# Altium PCB PCB.PcbDoc
Units mm, origin at the board's own origin, x right, y up, seen from the top; angles counter-clockwise.
Board outline 35.7 x 16.8 mm, 2 copper layers (Top Layer, Bottom Layer), stack 1.671 mm thick; 11 components, 9 nets, 30 pads, 7 vias.
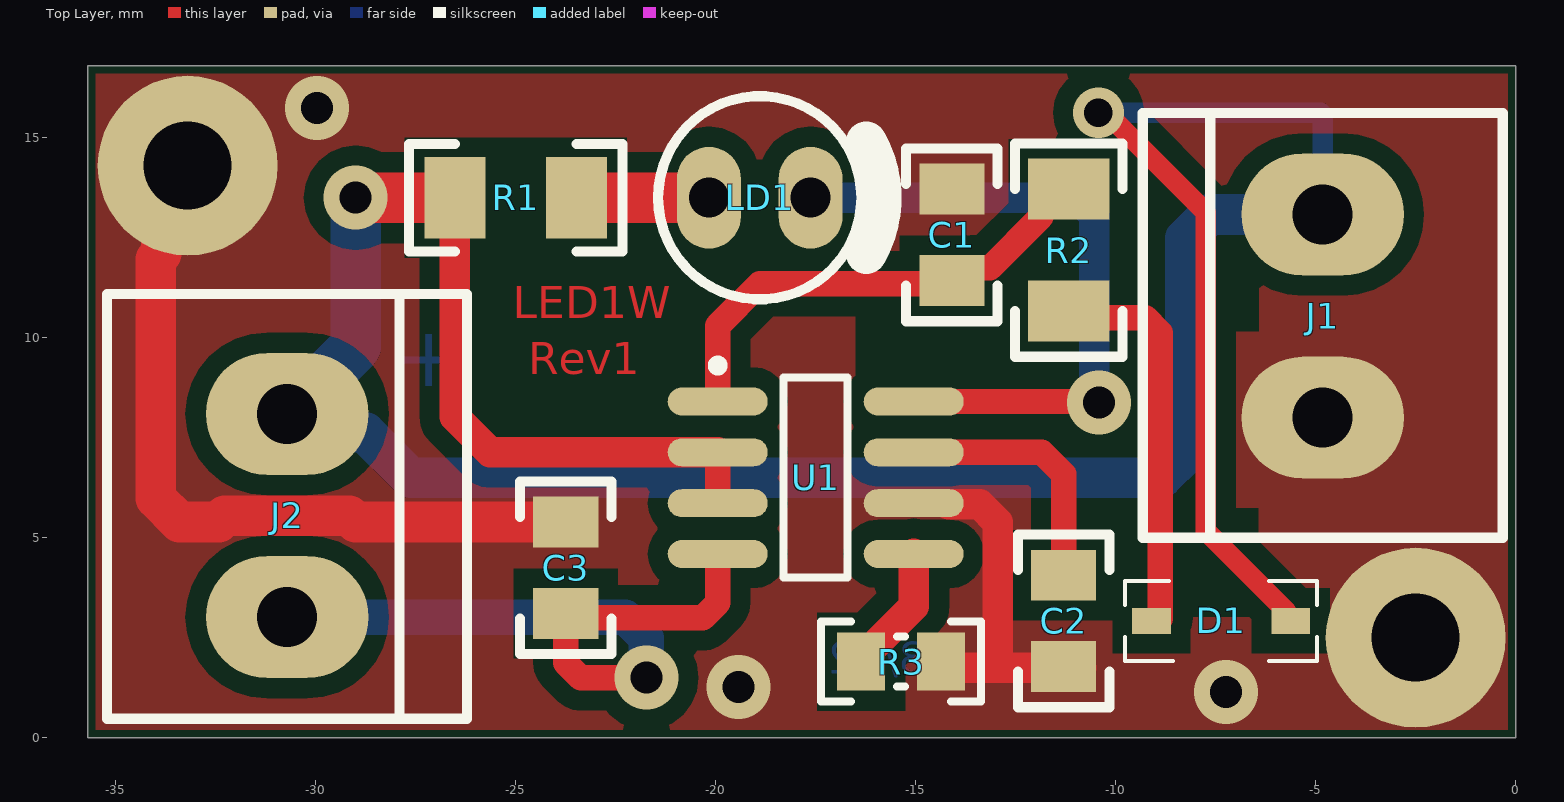
[diagram p0: Top Layer view]
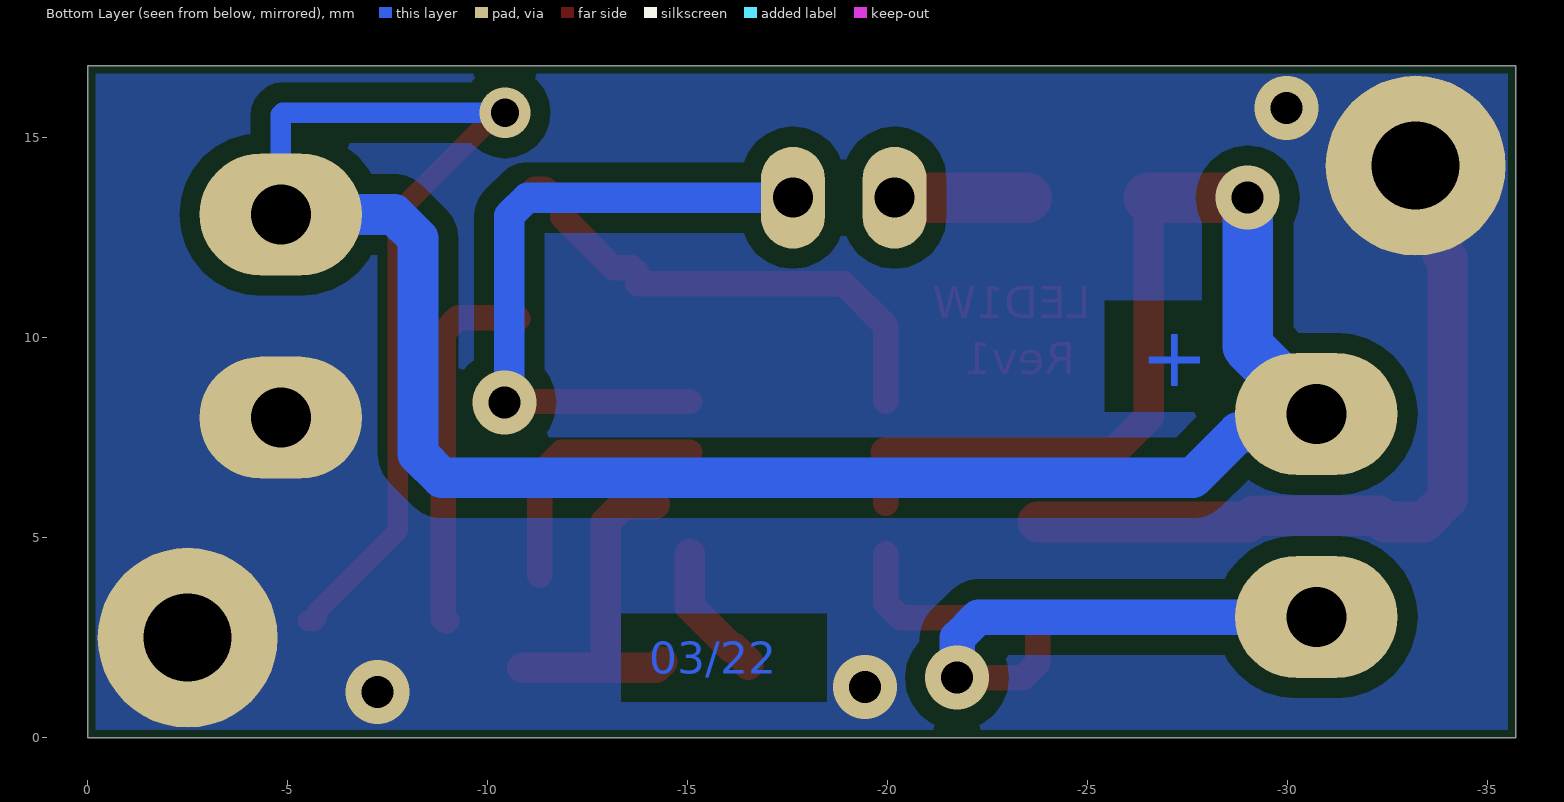
[diagram p1: Bottom Layer view, seen from below]
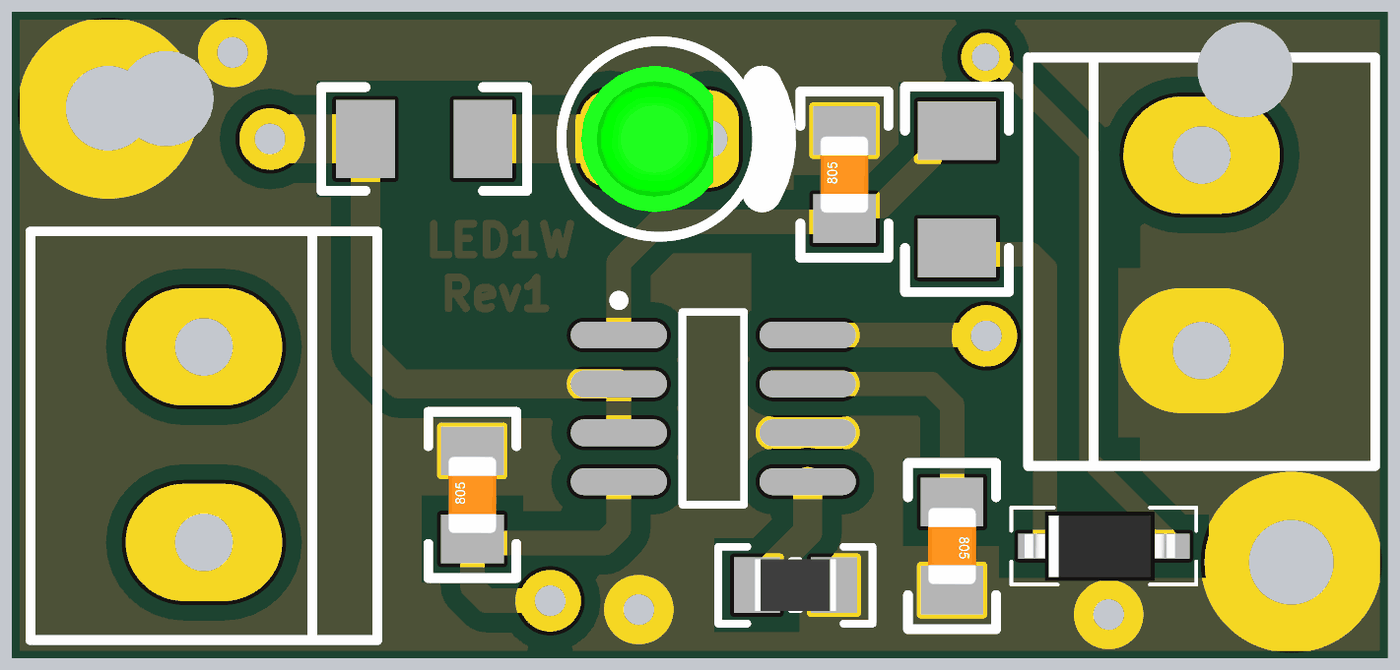
[diagram p2: 3D render of the assembled board from above, using the file's embedded part models]

## Layer stack, top to bottom
Top Solder: solder mask 0.0102, Solder Resist, Dk 3.5
Top Layer: signal copper 0.0356
Dielectric 1: dielectric 1.6, FR-4, Dk 4.8
Bottom Layer: signal copper 0.0356
Bottom Solder: solder mask 0.0102, Solder Resist, Dk 3.5

## Board outline
-35.7,16.8 0,16.8 0,0 -35.7,0

## Design rules (kind name [scope] priority, off if disabled: settings)
Clearance [All] p1: gap=0.5 ignorepadtopadclearanceinfootprint=FALSE
PolygonConnect [All] p1: connectstyle=Direct reliefconductorwidth=0.254 reliefentries=4 polygonreliefangle="90 Angle" airgapwidth=0.254
RoutingVias [All] p1: holewidth=0.711 width=1.27 viastyle="Through Hole" minholewidth=0.711 minwidth=1.27 maxholewidth=0.711 maxwidth=1.27
SolderMaskExpansion [All] p1: expansion=0.102 istentingtop=FALSE
Width [All] p1: maxlimit=1.5 minlimit=0.381 preferedwidth=0.635
30 further rules are at their usual default settings.

## Components (designator, comment, footprint, x,y, rotation, side; value= is the part's Value field where it differs from the comment)
C1 "CAPNP" "0805 SMD CAP" -14.097,12.573 r90 top
C2 "CAPNP" "0805 SMD CAP" -11.303,2.921 r270 top
C3 "CAPNP" "0805 SMD CAP" -23.75,4.25 r90 top
D1 "schottky diode" "BAT46ZFILM DIODE" -7.366,2.921 r180 top value=BAT46
J1 "INPUT 5V" CONN-5083-2P#1 -4.826,8.001 r90 top
J2 "LED CON" CONN-5083-2P#2 -30.716,8.097 r270 top locked
LD1 "Osram 0805 SMD GRN LED" LED3MM -18.9,13.5 r0 top
R1 "RES1" SMD1206N -25,13.5 r180 top
R2 "RES1" SMD1206N -11.176,12.192 r90 top
R3 "RES1" "0805 SMD RES" -15.367,1.905 r180 top
U1 "STCS05DR" SO8_M -17.5,6.5 r0 top

## Footprints (in the part's own frame and the unit in brackets; to place one, negate y for a bottom-side part, rotate by r counter-clockwise, add the part's x,y. Pads: shape width x height; smd on the part's side, far side on the other; paste and mask are expansions set on the pad)
"0805 SMD CAP" [mil]
  rect 50x64 smd: 1(-45,0) 2(45,0)
  silkscreen extent -85,-45 85,45, body extent -39,-25 39,25, height 31
"0805 SMD RES" [mm]
  rect 1.2x1.45 smd: 1(-1,0) 2(1,0)
  silkscreen extent -2,-1 2,1, body extent -1.05,-0.68 1.05,0.67, height 0.6
"BAT46ZFILM DIODE" [mm]
  rect 0.97x0.65 smd: A(-1.74,0) K(1.74,0)
  silkscreen extent -2.4,-1 2.4,1, body extent -1.85,-0.9 2.05,0.9, height 1.18
CONN-5083-2P#1 [mil]
  oval 120x160 hole 59: 1(0,0) 2(200,0)
  silkscreen extent -118,-177 300,177, body extent -117,-177 300,177, height 500
CONN-5083-2P#2 [mil]
  oval 120x160 hole 59.06: 1(0,0) 2(200,0)
  silkscreen extent -118,-177 300,177, body extent -117,-177 300,177, height 500
LED3MM [mm]
  oval 1.6x2.54 hole 1: A(-1.27,0) K(1.27,0)
  silkscreen extent -2.54,-2.54 3.04,2.54, body extent -2.03,-1.9 1.4,1.9, height 7.64
SMD1206N [mil]
  rect 60x80 smd: 1(-60,0) 2(60,0)
  silkscreen extent -105,-53 105,53
SO8_M [mm] "SOIC, 8-Leads, Body 4.9x3.9mm, Pitch 1.27mm, IPC Low Density"
  oval 2.5x0.7 smd: 1(-2.45,1.905) 2(-2.45,0.635) 3(-2.45,-0.635) 4(-2.45,-1.905) 5(2.45,-1.905) 6(2.45,-0.635) 7(2.45,0.635) 8(2.45,1.905)
  silkscreen extent -2.57,-2.5 0.8,2.93, body extent -2,-2.5 2,2.5, height 1.75

## Part data
C1 C2 C3: "Capacitor"
D1: library part D-1, "Diode"
J1 J2: library part CONN2, "Connector"
LD1: library part LED-1
U1: library part STCS05ADR, "0.5 A Max Constant Current LED Driver, 8-Pin SO, Tape and Reel", Code_IPC=SOIC127P600-8, Code_JEDEC=MS-012-AA, ComponentLink1Description="Manufacturer URL", ComponentLink1URL=http://www.st.com, ComponentLink2Description=Datasheet, ComponentLink2URL=http://www.st.com/internet/com/TECHNICAL_RESOURCES/TECHNICAL_LITERATURE/DATASHEET/CD00187179.pdf, ComponentLink3Description="Package Specification", ComponentLink3URL=http://www.st.com/internet/com/TECHNICAL_RESOURCES/TECHNICAL_LITERATURE/PACKAGE_INFORMATION/CD00004680.pdf, DatasheetVersion=1/07/2008, PackageDescription="8-Pin Small Outline Integrated Circuit 1.27 mm Pitch", PackageReference=SO8, PackageVersion=1/12/2002

## Free pads (board coordinates)
  round 4.5 hole 2.2: 11(-33.2,14.3) 11(-2.5,2.5)

## Via types
v1: diameter 1.6, hole 0.8, Top Layer to Bottom Layer, 6 vias
v2: diameter 1.27, hole 0.711, Top Layer to Bottom Layer, 1 vias

## Nets (pads, with @x,y where several pads share a name; then routed paths per layer and width w, separated by ;. In a path a pad name is that pad's centre, name@x,y a point inside that pad or via, vN(x,y) a via of type N, cw(c..) or ccw(c..) an arc to the next point about the centre after c; other vN are vias at no path point)
GND: C1.2 C2.2 C3.2 J1.1 pad.11 R3.1 U1.6 | length 27.6
  Top Layer w0.381: C2.2@-11.41,1.671 C2.2
  Top Layer w0.762: R3.1 -14.212,1.75 -12.508,1.75 C2.2@-10.857,1.75 ; U1.6@-14.181,5.834 -13.4,5.834 -12.954,5.388 -12.954,2.196
  Top Layer w1.016: pad.11@-33.2,14.3 -33.867,13.633 -33.867,12.096 -34,11.963 -34,5.988 -33.405,5.393 -32.428,5.393 -32.272,5.549 -29.159,5.549 -29.003,5.393 C3.2
  other v1: -7.239,1.143 -19.431,1.27 -29.972,15.748
NetC1_1: C1.1 R2.2 U1.1 | length 12.4
  Top Layer w0.635: U1.1 -19.95,10.3 -18.903,11.347 -13.75,11.347 -13.75,11.599 -13.602,11.747 -13.145,11.747 -11.875,13.018 -11.875,13.271 -11.43,13.716 R2.2
NetC2_1: C2.1 U1.7 | length 6.5
  Top Layer w0.635: U1.7 -11.845,7.135 -11.303,6.593 C2.1
NetC3_1: C3.1 J2.2 U1.4 | length 18.8
  Top Layer w0.635: v1(-21.733,1.5) -23.378,1.5 -23.75,1.872 C3.1 -23.572,3.107 -23.465,3 -20.322,3 -19.95,3.372 U1.4
  Bottom Layer w0.889: J2.2 -22.263,3.017 -21.743,2.496 -21.743,1.51 v1(-21.733,1.5)
NetD1_K: D1.K R2.1 | length 9.3
  Top Layer w0.635: R2.1@-10.75,10.476 -10.726,10.5 -9.262,10.5 -8.89,10.128 -8.89,2.977 -8.946,2.921 D1.K@-8.979,2.921
NetLD1_A: LD1.A R1.1 | length 3.3
  Top Layer w1.27: R1.1 LD1.A
NetLD1_K: LD1.K U1.8 | length 16.6
  Top Layer w0.635: U1.8 -10.437,8.405 v1(-10.414,8.382)
  Bottom Layer w0.762: LD1.K -10.987,13.5 -10.541,13.054 -10.541,8.509 v1(-10.414,8.382)
NetR3_2: R3.2 U1.5 | length 3.4
  Top Layer w0.762: R3.2@-16.51,1.825 -16.51,1.887 -16.148,2.249 -16.086,2.249 -15.05,3.285 U1.5
VCC: D1.A J1.2 J2.1 R1.2 U1.2 U1.3 | length 77.8
  Top Layer w0.508: v2(-10.432,15.625) -10.241,15.625 -7.747,13.131 -7.747,5.169 -5.73,3.152 -5.73,2.992 -5.659,2.921 D1.A@-5.499,2.921
  Top Layer w0.635: U1.3 U1.2
  Top Layer w0.762: R1.2 -26.524,8.024 -25.635,7.135 U1.2
  Top Layer w1.27: v1(-29,13.5) R1.2
  Bottom Layer w0.508: v2(-10.432,15.625) -4.874,15.625 -4.826,15.577 J1.2
  Bottom Layer w1.016: J2.1@-30.689,8.097 J2.1 -30.254,7.635 -28.764,7.635 -27.629,6.5 -8.85,6.5 -8.255,7.095 -8.255,12.486 -7.66,13.081 J1.2
  Bottom Layer w1.27: J2.1@-30.689,8.097 -29,9.785 v1(-29,13.5)

## Polygon pours and split planes (outlines as drawn)
GND on Bottom Layer "NONET_L01_P-001" (solid, remove dead copper, pour order 4): -35.5,16.6 -35.5,0.2 -0.2,0.2 -0.2,16.6
GND on Top Layer "NONET_L01_P-001" (solid, remove dead copper, pour order 0): -35.5,16.6 -35.5,0.2 -0.2,0.2 -0.2,16.6

## Other copper
Top Layer:
  pour cut-out: -16.51,8.89 -11.938,8.89 -11.938,11.176 -16.51,11.176
  pour cut-out: -9.216,12.192 -6.418,12.192 -6.418,10.15 -7.483,10.15 -8.382,11.049 -9.271,11.049 -9.271,11.43 -9.398,11.557 -11.684,11.557 -11.684,12.319 -9.576,12.319
  pour cut-out: -12.063,3.008 -6.425,3.008 -6.425,5.745 -9.9,5.745 -9.9,3.5 -12.063,3.5
  pour cut-out: -27.786,15.016 -27.786,12.355 -22.214,12.355 -22.214,15.016
  text "LED1W" at -25.073,10.487 h0.8
  text "Rev1" at -24.692,9.09 h0.8
Bottom Layer:
  text "+" at -26.308,8.786 h1.5
  text "03/22" at -14.043,1.597 h0.8

## Silkscreen, mask and mechanical layers (free items; w line width, h text height)
Mechanical 1:
  lines w0.1: 0,0 -35.7,0 -35.7,16.775 0,16.775
Board:
  lines w0.2: -32.938,14.55 ccw(c-31.68,14.55) -32.936,14.487 ccw(c-31.7,14.55) -31.852,13.322 ccw(c-31.701,14.557) -31.765,13.314 ccw(c-31.7,14.57) -31.7,13.313 ccw(c-31.7,14.571) -31.637,13.314 ccw(c-31.7,14.551) -30.472,14.399 ccw(c-31.707,14.55) -30.464,14.485 ccw(c-31.72,14.55) -30.462,14.55 ccw(c-31.721,14.55) -30.464,14.613 ccw(c-31.7,14.55) -31.549,15.779 ccw(c-31.699,14.543) -31.635,15.786 ccw(c-31.7,14.53) -31.7,15.788 ccw(c-31.7,14.53) -31.763,15.786 ccw(c-31.7,14.55) -32.929,14.702 ccw(c-31.693,14.551) -32.936,14.615 ccw(c-31.68,14.55) -32.938,14.55 ; -4.938,15.3 ccw(c-3.68,15.3) -4.936,15.237 ccw(c-3.7,15.3) -3.852,14.072 ccw(c-3.701,15.307) -3.765,14.064 ccw(c-3.7,15.32) -3.7,14.062 ccw(c-3.7,15.321) -3.637,14.064 ccw(c-3.7,15.301) -2.472,15.149 ccw(c-3.707,15.3) -2.464,15.235 ccw(c-3.72,15.3) -2.462,15.3 ccw(c-3.721,15.3) -2.464,15.363 ccw(c-3.7,15.3) -3.549,16.529 ccw(c-3.699,15.293) -3.635,16.536 ccw(c-3.7,15.28) -3.7,16.538 ccw(c-3.7,15.28) -3.763,16.536 ccw(c-3.7,15.3) -4.929,15.452 ccw(c-3.693,15.301) -4.936,15.365 ccw(c-3.68,15.3) -4.938,15.3